# Altium PCB PCB1.PcbDoc (part 1 of 3)
Units mil, origin at the board's own origin, x right, y up, seen from the top; angles counter-clockwise.
Board outline 3200 x 1500 mil, 4 copper layers (L1, L2, L3, L4), stack 61.583 mil thick; 64 components, 73 nets, 299 pads, 164 vias.
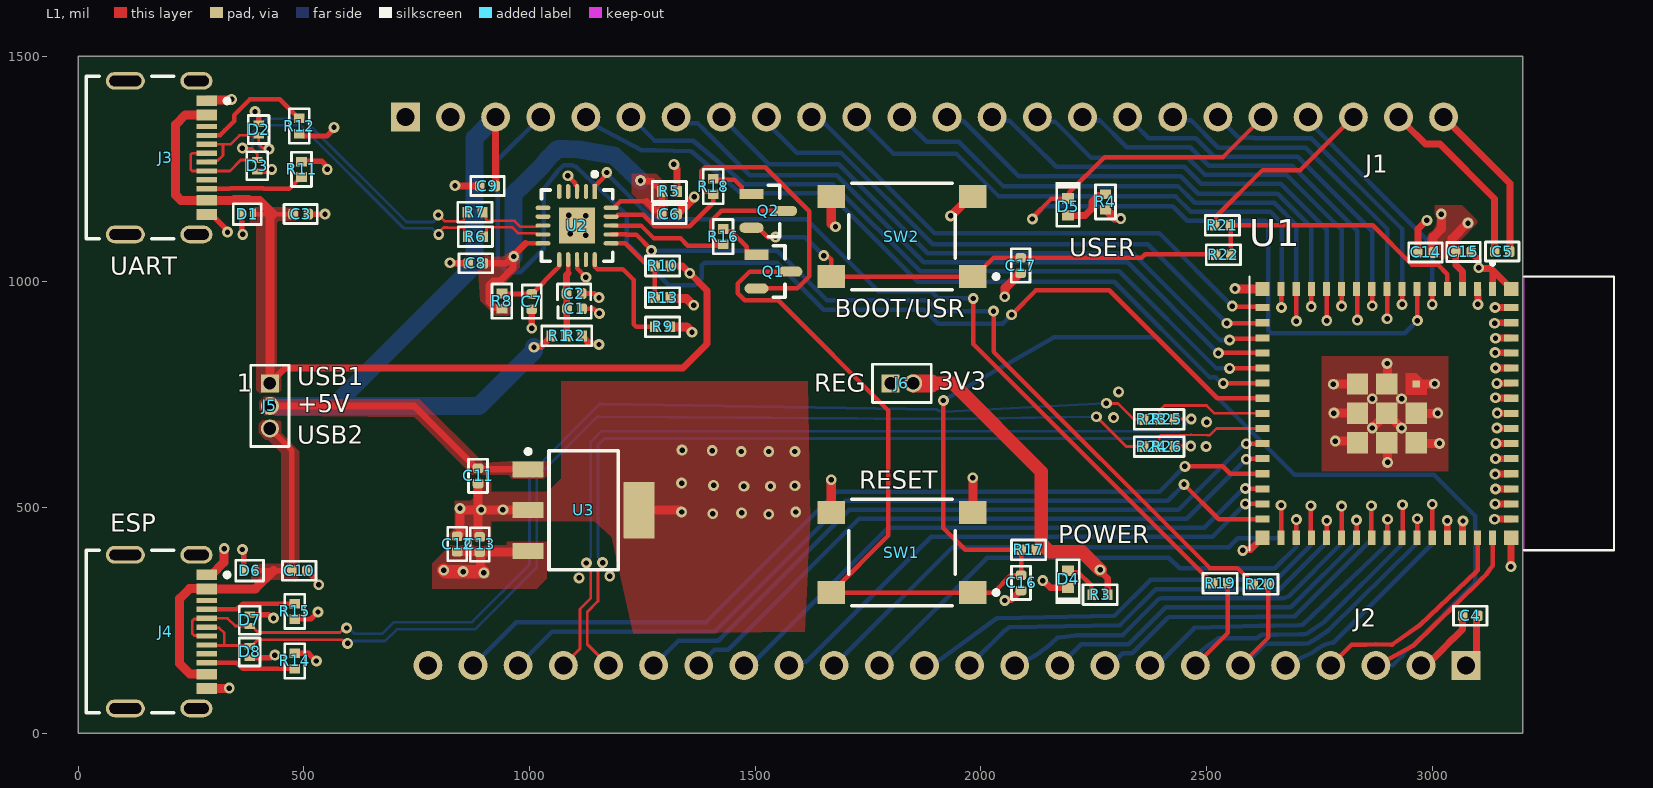
[diagram p0: L1 view]
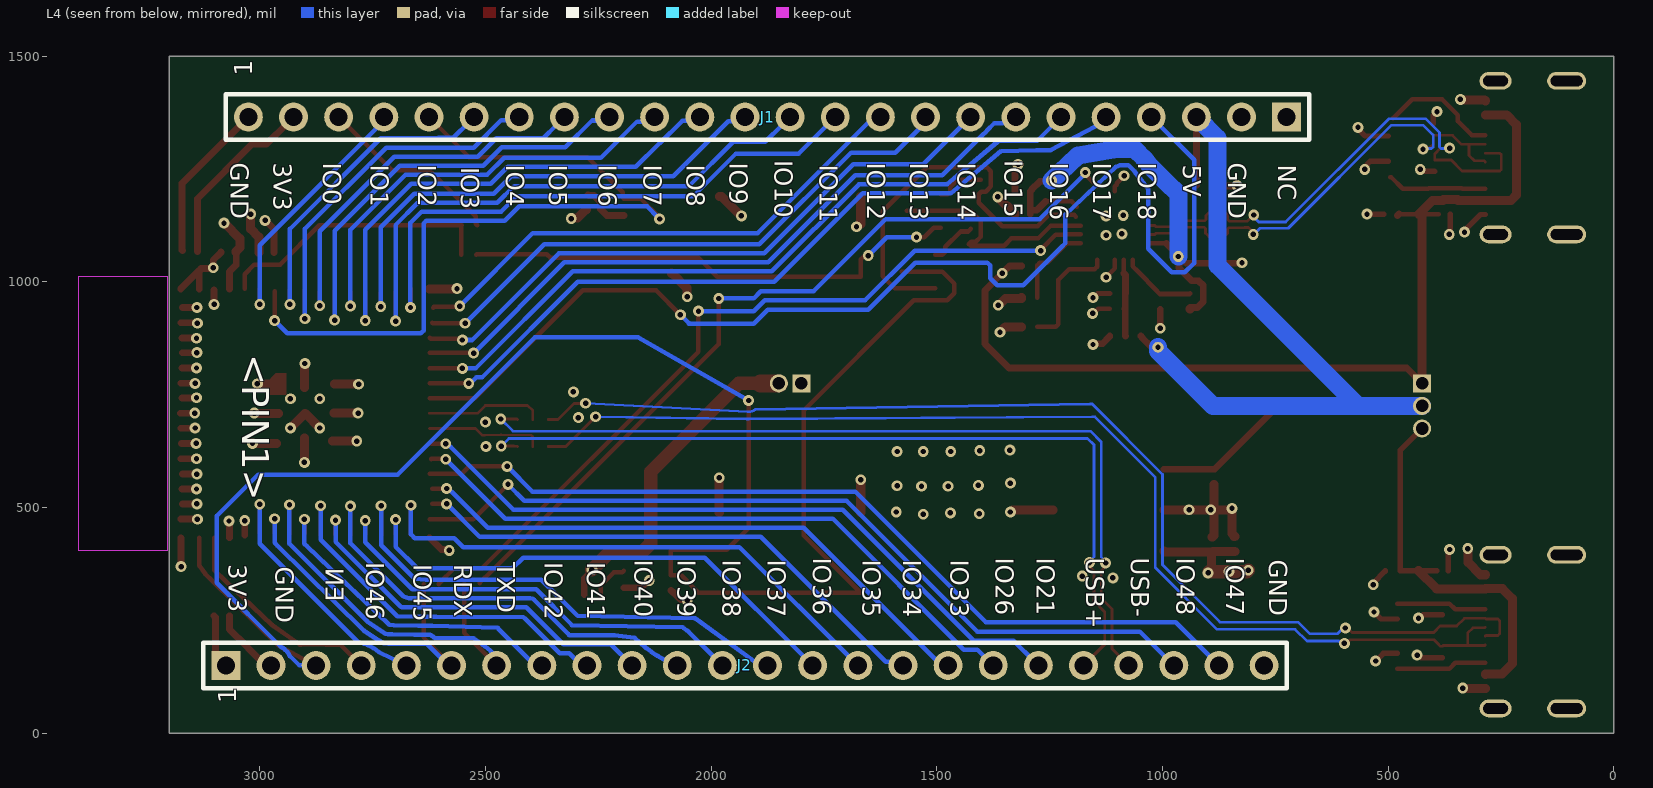
[diagram p1: L4 view, seen from below]
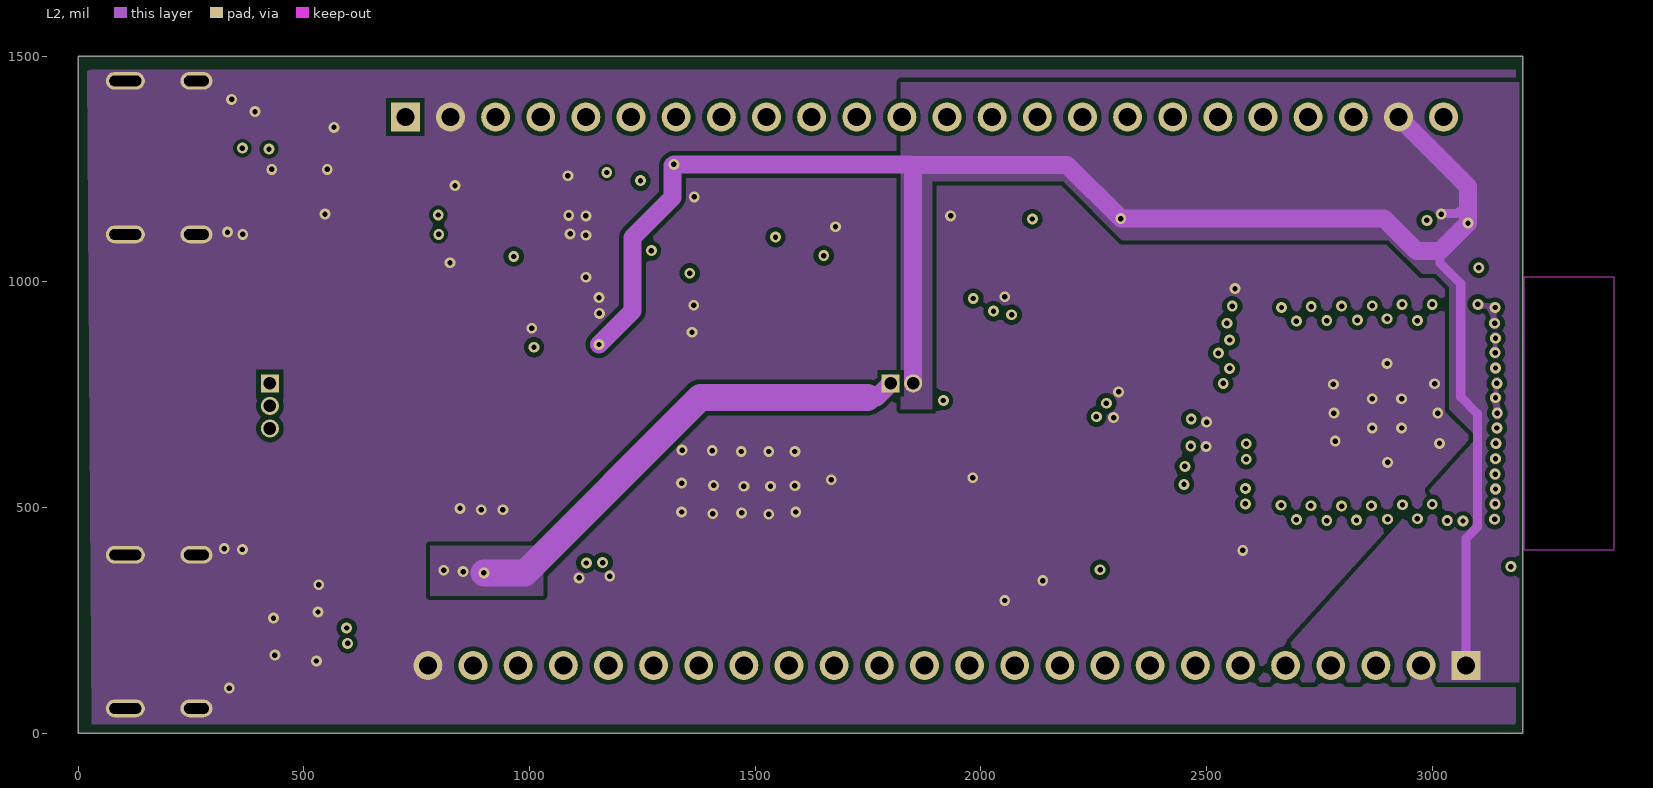
[diagram p2: L2]
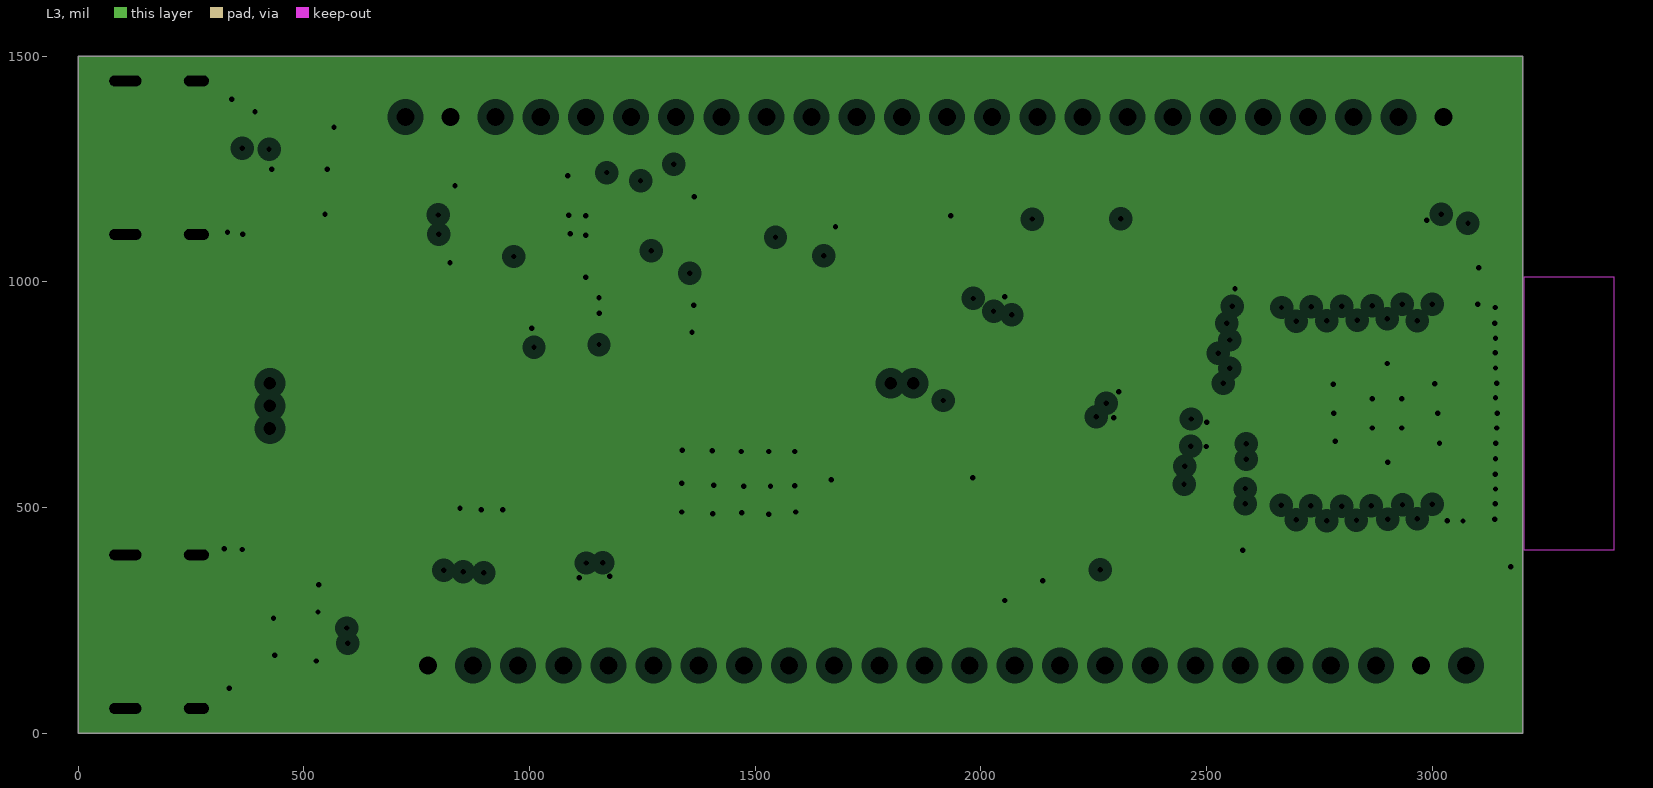
[diagram p3: L3, clearances drawn from the general rule]
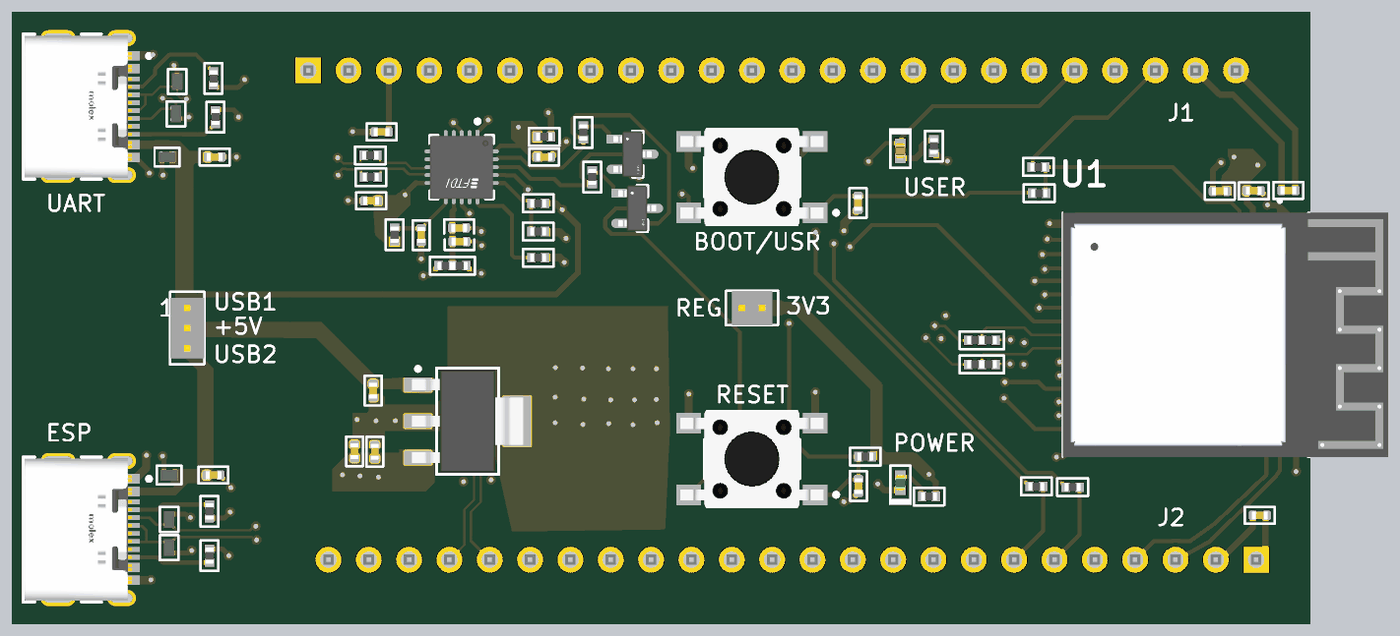
[diagram p5: 3D render of the assembled board from above, using the file's embedded part models]

## Layer stack, top to bottom
Top Solder: solder mask 0.4, Solder Resist, Dk 3.5
L1: signal copper 1.378
Dielectric 2: prepreg 3.9134, PP-006, Dk 4.1
L2: signal copper 0.5984
Dielectric 1: dielectric 49.8031, FR-4, Dk 4.8
L3: plane copper 0.5984, net GND
Dielectric 3: prepreg 3.9134, PP-006, Dk 4.1
L4: signal copper 1.378
Bottom Solder: solder mask 0.4, Solder Resist, Dk 3.5

## Board outline
0,0 3200,0 3200,1500 0,1500

## Design rules (kind name [scope] priority, off if disabled: settings)
Clearance SMALLER [WithinRoom('FTDI') or WithinRoom('USBC2') or WithinRoom('USBC1')] p1: gap=6 ignorepadtopadclearanceinfootprint=FALSE
Clearance "DIFFPAIR Clearance" [InDifferentialPairClass('DIFF90')] p2: gap=8 ignorepadtopadclearanceinfootprint=FALSE
Clearance [All] p3: gap=10 ignorepadtopadclearanceinfootprint=FALSE except(6: SMDPad-SMDPad)
ComponentClearance R24R26 [InComponent('R24') vs InComponent('R26')] p1: gap=0 collisioncheckmode=3 verticalgap=0 showdistances=FALSE
ComponentClearance R1R2 [InComponent('R1') vs InComponent('R2')] p2: gap=0 collisioncheckmode=3 verticalgap=0 showdistances=FALSE
ComponentClearance R23R25 [InComponent('R23') vs InComponent('R25')] p3: gap=0 collisioncheckmode=3 verticalgap=0 showdistances=FALSE
ComponentClearance [All] p4: gap=10 collisioncheckmode=3 verticalgap=10 showdistances=FALSE
DiffPairsRouting DIFF90 [InDifferentialPairClass('DIFF90')] p1: maxlimit=8.1 minlimit=8 mostfreqgap=8 toplayer_minwidth=6.03 toplayer_maxwidth=6.23 toplayer_prefwidth=6.03 midlayer1_minwidth=5.1 midlayer1_maxwidth=5.2 midlayer1_prefwidth=5.1 bottomlayer_minwidth=6.03 bottomlayer_maxwidth=6.23 bottomlayer_prefwidth=6.03 maxuncoupledlength=500
MinimumSolderMaskSliver [All] p1: minsoldermaskwidth=3.15
PlaneClearance [All] p1: clearance=20
PlaneConnect [All] p1: pad.planeconnectstyle=Relief pad.reliefexpansion=20 pad.reliefentries=4 pad.reliefconductorwidth=20 pad.reliefairgap=10 via.planeconnectstyle=Direct via.reliefexpansion=20 via.reliefentries=4 via.reliefconductorwidth=10 via.reliefairgap=10
PolygonConnect [All] p1: connectstyle=Direct reliefconductorwidth=10 reliefentries=4 polygonreliefangle="90 Angle" airgapwidth=10
RoomDefinition FTDI [False] p1: confinementstyle=ConfineIn formatcopy=TRUE lockcomponents=FALSE outline 992,1258 1224,1258 1224,1023 992,1023
RoomDefinition USBC1 [False] p2: confinementstyle=ConfineIn formatcopy=TRUE lockcomponents=FALSE outline 233,1418 325,1418 325,1131 233,1131
RoomDefinition USBC2 [False] p3: confinementstyle=ConfineIn formatcopy=TRUE lockcomponents=FALSE outline 231,79 334,79 334,375 231,375
RoutingVias [All] p1: holewidth=12 width=24 viastyle="Through Hole" minholewidth=12 minwidth=24 maxholewidth=12 maxwidth=24
SilkToSolderMaskClearance [IsPad] p1: minsilkscreentomaskgap=6 clearancetoexposedcopper=TRUE
SolderMaskExpansion [All] p1: expansion=2 istentingtop=FALSE
SupplyNets "Schematic Supply Nets_5" [InNet('GND')] p1: voltage=0.000
SupplyNets "Schematic Supply Nets_4" [InNet('+3V3_REG')] p2: voltage=0.000
SupplyNets "Schematic Supply Nets_3" [InNet('+5V_VBUS2')] p3: voltage=0.000
SupplyNets "Schematic Supply Nets_2" [InNet('+5V')] p4: voltage=0.000
SupplyNets "Schematic Supply Nets_1" [InNet('+3V3')] p5: voltage=0.000
SupplyNets "Schematic Supply Nets" [InNet('+5V_VBUS1')] p6: voltage=0.000
Width [All] p1: maxlimit=100 minlimit=10 preferedwidth=10 minimp=50.000000 maximp=50.000000 favimp=50.000000
24 further rules are at their usual default settings.

## Classes and differential pairs
differential pair class DIFF90: CON1_USB FTDI_USB
differential pair FTDI_USB: +FTDI_USB_P -FTDI_USB_N
differential pair ESP_USB: +ESP_USB_P -ESP_USB_N
differential pair CON_ESP_USB: +CON_ESP_USB_P -CON_ESP_USB_N
differential pair CON2_USB: +CON2_USB_P -CON2_USB_N
differential pair CON1_USB: +CON1_USB_P -CON1_USB_N

## Components (designator, comment, footprint, x,y, rotation, side; value= is the part's Value field where it differs from the comment)
C1 "4u7, 16V" CAPC1005X55N 1100,940 r180 top value=4.7µF
C2 "100nf,50v" CAPC1005X55N 1099,974 r180 top value=100nF
C3 "100nf,50v" CAPC1005X55N 493.07,1150 r180 top value=100nF
C4 "100nf,50v" CAPC1005X55N 3084.07,260 r0 top value=100nF
C5 "100nf,50v" CAPC1005X55N 3155,1067 r180 top value=100nF
C6 "100nf,50v" CAPC1005X55N 1310,1150 r180 top value=100nF
C7 "100nf,50v" CAPC1005X55N 1005,956 r90 top value=100nF
C8 "100nf,50v" CAPC1005X55N 881,1041 r0 top value=100nF
C9 "100nf,50v" CAPC1005X55N 907,1212 r0 top value=100nF
C10 "100nf,50v" CAPC1005X55N 490,360 r180 top value=100nF
C11 "4u7, 16V" CAPC1005X55N 886,570 r90 top value=4.7µF
C12 "10UF ,10V" CAPC1005X55N 840,419 r270 top value=10µF
C13 "10UF ,10V" CAPC1005X55N 890,418 r270 top value=10µF
C14 "10UF ,10V" CAPC1005X55N 2985,1065 r0 top value=10µF
C15 "10UF ,10V" CAPC1005X55N 3069,1066 r180 top value=10µF
C16 "1uf 35V" CAPC1005X55N 2089,333 r90 top value=1µF
C17 "100nf,50v" CAPC1005X55N 2088,1036 r90 top value=100nF
D1 "AQ3045-01ETG" SOD882 375,1150 r0 top
D2 "AQ3045-01ETG" SOD882 400,1337.2 r270 top
D3 "AQ3045-01ETG" SOD882 397,1257 r90 top
D4 "GREEN" LED0402G 2193,341 r90 top
D5 "RED" LED0402R 2193,1165.7 r270 top
D6 "AQ3045-01ETG" SOD882 380,360 r0 top
D7 "AQ3045-01ETG" SOD882 380,250 r270 top
D8 "AQ3045-01ETG" SOD882 380,180 r90 top
J1 "0022284245" HDR_1X24_2.54MM 725,1365 r270 bottom
J2 "0022284245" HDR_1X24_2.54MM 3075,150 r90 bottom locked
J3 "217179-0001" FP-2171790001-MFG 150,1275 r270 top locked
J4 "217179-0001" FP-2171790001-MFG 150,225 r270 top locked
J5 "FTS-103-01-F-S" HDR_1X3_1.27MM 425,775 r0 top locked
J6 "FTS-102-01-F-S" HDR_1X2_1.27MM 1800,775 r90 top locked
Q1 "SS8050-G" FP-SS8050-G-IPC_B 1540.42,1022.6 r0 top
Q2 "SS8050-G" FP-SS8050-G-IPC_B 1529,1157 r0 top
R1 "0R" RESC1005X37N 1065,880 r0 top value=0Ω
R2 "0R" RESC1005X37N 1100,880 r180 top value=0Ω
R3 "1K NEW" RESC1005X37N 2264,307 r0 top value=1kΩ
R4 "1K NEW" RESC1005X37N 2276,1177 r270 top value=1kΩ
R5 "0R" RESC1005X37N 1310,1200 r180 top value=0Ω
R6 "27R" RESC1005X37N 880,1100 r0 top value=27Ω
R7 "27R" RESC1005X37N 879,1154 r0 top value=27Ω
R8 "27R" RESC1005X37N 939,957 r90 top value=27Ω
R9 "10K" RESC1005X37N 1295,900 r0 top value=10kΩ
R10 "4K7" RESC1005X37N 1295,1035 r0 top value=4.7kΩ
R11 "5K1" RESC1005X37N 495,1249 r270 top value=5.1kΩ
R12 "5K1" RESC1005X37N 490,1345 r90 top value=5.1kΩ
R13 "10K" RESC1005X37N 1295,965 r0 top value=10kΩ
R14 "5K1" RESC1005X37N 480,160 r270 top value=5.1kΩ
R15 "5K1" RESC1005X37N 480,270 r90 top value=5.1kΩ
R16 "10K" RESC1005X37N 1429,1100 r90 top value=10kΩ
R17 "10K" RESC1005X37N 2106,406 r0 top value=10kΩ
R18 "10K" RESC1005X37N 1407,1211 r90 top value=10kΩ
R19 "0R" RESC1005X37N 2529.99,332 r180 top value=0Ω
R20 "0R" RESC1005X37N 2619.99,330 r180 top value=0Ω
R21 "27R" RESC1005X37N 2535,1125 r0 top value=27Ω
R22 "27R" RESC1005X37N 2537.01,1060 r0 top value=27Ω
R23 "0R" RESC1005X37N 2378.01,695 r0 top value=0Ω
R24 "0R" RESC1005X37N 2378.01,635 r0 top value=0Ω
R25 "0R" RESC1005X37N 2411.99,695 r180 top value=0Ω
R26 "0R" RESC1005X37N 2411.99,635 r180 top value=0Ω
SW1 "PTS645SH50SMTR92LFS" FP-PTS645SH50SMTR92LFS-MFG 1825,400 r180 top locked
SW2 "PTS645SH50SMTR92LFS" FP-PTS645SH50SMTR92LFS-MFG 1825,1100 r180 top locked
U1 "ESP32-S3-MINI-1-N8" XCVR_ESP32-S3-MINI-1-N8 2899.41,708.46 r270 top locked
U2 "FT231XQ-R" FP-QFN-20-IPC_B 1105.32,1124.59 r270 top locked
U3 "TL1963A-33DCYR" DCY0004A_N 1120,494 r0 top locked

## Footprints (in the part's own frame and the unit in brackets; to place one, negate y for a bottom-side part, rotate by r counter-clockwise, add the part's x,y. Pads: shape width x height; smd on the part's side, far side on the other; paste and mask are expansions set on the pad)
CAPC1005X55N [mm]
  rrect53% 0.54x0.6 smd: 1(-0.43,0) 2(0.43,0)
  silkscreen extent -0.94,-0.13 0.94,0.53, body extent -0.5,-0.25 0.5,0.25, height 0.55
DCY0004A_N [mm] "SOT223, 4-Leads, Body 6.7x3.7mm, Pitch 2.3mm, IPC Medium Density"
  rrect11% 1.75x0.9 smd: 1(-3.125,2.3) 2(-3.125,0) 3(-3.125,-2.3)
  rrect6% 1.75x3.2 smd: 4(3.125,0)
  silkscreen extent -3.25,-3.35 1.95,3.42, body extent -3.5,-3.25 3.5,3.25, height 1.62
FP-2171790001-MFG [mm]
  rect 0.6x1.15 smd paste+0 mask+0: A1B12(-3.2,3.425) A4B9(-2.4,3.425) B1A12(3.2,3.425) B4A9(2.4,3.425)
  rect 0.3x1.15 smd paste+0 mask+0: A5(-1.25,3.425) A6(-0.25,3.425) A7(0.25,3.425) A8(1.25,3.425) B5(1.75,3.425) B6(0.75,3.425) B7(-0.75,3.425) B8(-1.75,3.425)
  rrect100% 1x1.8 hole 1.4 slot 0.6 at 0 deg paste-2539.97 mask+0: S1(-4.32,2.85) S2(4.32,2.85)
  rrect100% 1x2.2 hole 1.8 slot 0.6 at 0 deg paste-2539.97 mask+0: S3(-4.32,-1.15) S4(4.32,-1.15)
  silkscreen extent -4.57,-3.35 4.57,4.7, body extent -4.92,-3.45 4.92,4.1, height 0.25
FP-PTS645SH50SMTR92LFS-MFG [mm]
  rect 1.55x1.3 smd paste+0 mask+0: 1(-3.975,2.25) 2(3.975,2.25) 3(-3.975,-2.25) 4(3.975,-2.25)
  silkscreen extent -5.43,-3 3,3, body extent -4.5,-3 4.5,3, height 4.3
FP-QFN-20-IPC_B [mm]
  rect 0.84x0.242 smd paste+0 mask+0: 1(-1.916,1)
  rrect100% 0.84x0.242 smd paste+0 mask+0: 2(-1.916,0.5) 3(-1.916,0) 4(-1.916,-0.5) 5(-1.916,-1) 11(1.916,-1) 12(1.916,-0.5) 13(1.916,0) 14(1.916,0.5) 15(1.916,1)
  rrect100% 0.242x0.84 smd paste+0 mask+0: 6(-1,-1.916) 7(-0.5,-1.916) 8(0,-1.916) 9(0.5,-1.916) 10(1,-1.916) 16(1,1.916) 17(0.5,1.916) 18(0,1.916) 19(-0.5,1.916) 20(-1,1.916)
  rect 2.05x2.05 smd paste-1000 mask+0: 21(0,0)
  silkscreen extent -3.01,-2 2,2, body extent -2.59,-2.59 2.59,2.59, height 0.25
FP-SS8050-G-IPC_B [mm]
  rect 1.357x0.572 smd paste+0 mask+0: 1(-0.951,0.95)
  rrect100% 1.357x0.572 smd paste+0 mask+0: 2(-0.951,-0.95) 3(0.951,0)
  silkscreen extent 0,-1.45 0.65,1.45, body extent -1.88,-1.7 1.88,1.7, height 0.25
HDR_1X2_1.27MM [mil]
  rect 40x40 hole 28: 1(0,0)
  round 40 hole 28: 2(0,-50)
  silkscreen extent -42,-90 43,40, body extent -42,-75 43,25, height 154
HDR_1X3_1.27MM [mil]
  rect 40x40 hole 28: 1(0,0)
  round 40 hole 28: 2(0,-50) 3(0,-100)
  silkscreen extent -42,-140 42,40, body extent -42,-125 42,25, height 154
HDR_1X24_2.54MM [mil]
  rect 64x64 hole 40: 1(0,0)
  round 64 hole 40: 2(0,-100) 3(0,-200) 4(0,-300) 5(0,-400) 6(0,-500) 7(0,-600) 8(0,-700) 9(0,-800) 10(0,-900) 11(0,-1000) 12(0,-1100) 13(0,-1200) 14(0,-1300) 15(0,-1400) 16(0,-1500) 17(0,-1600) 18(0,-1700) 19(0,-1800) 20(0,-1900) 21(0,-2000) 22(0,-2100) 23(0,-2200) 24(0,-2300)
  silkscreen extent -50,-2350 50,50, body extent -49,-2350 49,50, height 386
LED0402G [mm]
  rect 0.6x0.7 smd: 1(-0.475,0) 2(0.475,0)
  silkscreen extent -1.4,-0.71 1.09,0.71, body extent -0.5,-0.3 0.5,0.3, height 0.21
LED0402R [mm]
  rect 0.6x0.7 smd: 1(-0.475,0) 2(0.475,0)
  silkscreen extent -1.4,-0.71 1.09,0.71, body extent -0.5,-0.3 0.5,0.3, height 0.21
RESC1005X37N [mm]
  rect 0.54x0.6 smd: 1(-0.432,0) 2(0.432,0)
  silkscreen extent -0.97,-0.56 0.97,0.56, body extent -0.5,-0.25 0.5,0.25, height 0.37
SOD882 [mm]
  rect 0.35x0.6 smd: 1(-0.325,0) 2(0.325,0)
  silkscreen extent -0.79,-0.58 0.79,0.58, body extent -0.54,-0.34 0.54,0.34, height 0.44
XCVR_ESP32-S3-MINI-1-N8 [mm]
  rect 0.8x0.4 smd: 1(-7,5.95) 2(-7,5.1) 3(-7,4.25) 4(-7,3.4) 5(-7,2.55) 6(-7,1.7) 7(-7,0.85) 8(-7,0) 9(-7,-0.85) 10(-7,-1.7) 11(-7,-2.55) 12(-7,-3.4) 13(-7,-4.25) 14(-7,-5.1) 15(-7,-5.95) 31(7,-5.95) 32(7,-5.1) 33(7,-4.25) 34(7,-3.4) 35(7,-2.55) 36(7,-1.7) 37(7,-0.85) 38(7,0) 39(7,0.85) 40(7,1.7) 41(7,2.55) 42(7,3.4) 43(7,4.25) 44(7,5.1) 45(7,5.95)
  rect 0.4x0.8 smd: 16(-5.95,-7) 17(-5.1,-7) 18(-4.25,-7) 19(-3.4,-7) 20(-2.55,-7) 21(-1.7,-7) 22(-0.85,-7) 23(0,-7) 24(0.85,-7) 25(1.7,-7) 26(2.55,-7) 27(3.4,-7) 28(4.25,-7) 29(5.1,-7) 30(5.95,-7) 46(5.95,7) 47(5.1,7) 48(4.25,7) 49(3.4,7) 50(2.55,7) 51(1.7,7) 52(0.85,7) 53(0,7) 54(-0.85,7) 55(-1.7,7) 56(-2.55,7) 57(-3.4,7) 58(-4.25,7) 59(-5.1,7) 60(-5.95,7)
  rect 1.2x1.2 smd: 61(0,0) 67(0,1.65) 68(1.65,1.65) 69(-1.65,0) 70(1.65,0) 71(-1.65,-1.65) 72(0,-1.65) 73(1.65,-1.65)
  rect 0.8x0.8 smd: 62(-7,7) 63(-7,-7) 64(7,-7) 65(7,7)
  rect 0.4x0.4 smd paste-1 mask+0: 66(-1.65,1.65)
  L1 region: -1.05,1.05 -2.25,1.05 -2.25,1.65 -1.65,2.25 -1.05,2.25
  Keep-Out Layer region: 7.7,7.725 -7.7,7.725 -7.7,12.775 7.7,12.775
  Keep-Out Layer region: 7.7,7.725 -7.7,7.725 -7.7,12.775 7.7,12.775
  silkscreen extent -8.55,-7.73 7.7,12.78, body extent -7.7,-7.73 7.7,12.78, height 2.55

## Part data
C1 C11: library part CL05A475MO5NUNC, "16V 4.7uF X5R ±20% 0402 Multilayer Ceramic Capacitors MLCC - SMD/SMT ROHS", Case Code (Imperial)=0402, Case Code (Metric)=1005, Dielectric=X5R, Dielectric Material=Ceramic, Manufacturer="Samsung Electro-Mechanics", Max Operating Temperature=85°C, Min Operating Temperature=-55°C, Supplier Part Number=1276-6836-1-ND, Tolerance=20%, Voltage Rating=16V, Case/Package=0402, Category="Ceramic Capacitors", China RoHS=Compliant, ComponentLink1Description=https://datasheet.octopart.com:443/CL05A475MO5NUNC-Samsung-Electro-Mechanics-datasheet-178175196.pdf?src-supplier=Farnell, ComponentLink1URL=https://datasheet.octopart.com:443/CL05A475MO5NUNC-Samsung-Electro-Mechanics-datasheet-178175196.pdf?src-supplier=Farnell, ComponentLink2Description=https://datasheet.octopart.com:443/CL05A475MO5NUNC-Samsung-Electro-Mechanics-datasheet-123102911.pdf?src-supplier=Future+Electronics, ComponentLink2URL=https://datasheet.octopart.com:443/CL05A475MO5NUNC-Samsung-Electro-Mechanics-datasheet-123102911.pdf?src-supplier=Future+Electronics, ComponentLink3Description=https://datasheet.octopart.com:443/CL05A475MO5NUNC-Samsung-Electro-Mechanics-datasheet-110226225.pdf?src-supplier=Future+Electronics, ComponentLink3URL=https://datasheet.octopart.com:443/CL05A475MO5NUNC-Samsung-Electro-Mechanics-datasheet-110226225.pdf?src-supplier=Future+Electronics, ComponentLink4Description=https://datasheet.octopart.com:443/CL05A475MO5NUNC-Samsung-Electro-Mechanics-datasheet-83567908.pdf?src-supplier=Future+Electronics, ComponentLink4URL=https://datasheet.octopart.com:443/CL05A475MO5NUNC-Samsung-Electro-Mechanics-datasheet-83567908.pdf?src-supplier=Future+Electronics, ComponentLink5Description=https://datasheet.octopart.com:443/CL05A475MO5NUNC-Samsung-Electro-Mechanics-datasheet-68297032.pdf?src-supplier=Future+Electronics, ComponentLink5URL=https://datasheet.octopart.com:443/CL05A475MO5NUNC-Samsung-Electro-Mechanics-datasheet-68297032.pdf?src-supplier=Future+Electronics, ComponentLink6Description=https://datasheet.octopart.com:443/CL05A475MO5NUNC-Samsung-Electro-Mechanics-datasheet-87580057.pdf?src-supplier=Future+Electronics, ComponentLink6URL=https://datasheet.octopart.com:443/CL05A475MO5NUNC-Samsung-Electro-Mechanics-datasheet-87580057.pdf?src-supplier=Future+Electronics, ComponentLink7Description=https://datasheet.octopart.com:443/CL05A475MO5NUNC-Samsung-Electro-Mechanics-datasheet-149136694.pdf?src-supplier=Future+Electronics, ComponentLink7URL=https://datasheet.octopart.com:443/CL05A475MO5NUNC-Samsung-Electro-Mechanics-datasheet-149136694.pdf?src-supplier=Future+Electronics, Height=500µm, Length=1mm, Lifecycle Status=Production, Manufacturer Part Number=CL05A475MO5NUNC, Material=Ceramic, Mounting Technology="Surface Mount", Number of Terminals=2, Pricing="1=0.1, 10=0.085 (USD)", REACH SVHC=Yes, RoHS=Compliant, Schedule B="8532240020, 8532240020|8532240020, 8532240020|8532240020|8532240020, 8532240020|8532240020|8532240020|8532240020", Stock=108072, Supplier=DigiKey, Thickness=558.8µm, Voltage Rating (DC)=16V, Width=500µm
C2 C3 C4 C5 C6 C7 C8 C9 C10 C17: library part CL05B104KB54PNC, "50V 100nF X7R ±10% 0402 Multilayer Ceramic Capacitors MLCC - SMD/SMT ROHS", Case/Package=0402, Dielectric Material=Ceramic, Manufacturer="Samsung Electro-Mechanics", Max Operating Temperature=125°C, Min Operating Temperature=-55°C, Supplier Part Number=1276-CL05B104KB54PNCCT-ND, Tolerance=10%, Voltage Rating=50V, Category="Ceramic Capacitors", China RoHS=Compliant, ComponentLink1Description=https://datasheet.octopart.com:443/CL05B104KB54PNC-Samsung-Electro-Mechanics-datasheet-182018727.pdf?src-supplier=IHS, ComponentLink1URL=https://datasheet.octopart.com:443/CL05B104KB54PNC-Samsung-Electro-Mechanics-datasheet-182018727.pdf?src-supplier=IHS, ComponentLink2Description=https://datasheet.octopart.com:443/CL05B104KB54PNC-Samsung-Electro-Mechanics-datasheet-138685816.pdf?src-supplier=Samsung+SCT, ComponentLink2URL=https://datasheet.octopart.com:443/CL05B104KB54PNC-Samsung-Electro-Mechanics-datasheet-138685816.pdf?src-supplier=Samsung+SCT, ComponentLink3Description=https://datasheet.octopart.com:443/CL05B104KB54PNC-Samsung-datasheet-8326407.pdf?src-supplier=TME, ComponentLink3URL=https://datasheet.octopart.com:443/CL05B104KB54PNC-Samsung-datasheet-8326407.pdf?src-supplier=TME, Height=500µm, Length=1mm, Lifecycle Status=Production, Manufacturer Part Number=CL05B104KB54PNC, Material=Ceramic, Mounting Technology="Surface Mount", Number of Terminals=2, Pricing="1=0.1, 10=0.036, 50=0.0246, 100=0.021, 500=0.01504, 1000=0.01387, 2500=0.01274, 5000=0.01196, 10000=0.01021, 20000=0.00846, 30000=0.00808, 50000=0.00765, 70000=0.0074, 100000=0.00716, 120000=0.00704, 240000=0.00666, 250000=0.00664 (USD)", REACH SVHC=Yes, RoHS=Compliant, Schedule B="8532240020, 8532240020|8532240020|8532240020|8532240020|8532240020|8532240020|8532240020|8532240020|8532240020|8532240020|8532240020|8532240020|8532240020|8532240020|8532240020|8532240020|8532240020|8532240020|8532240020|8532240020|8532240020|8532240020|8532240020|85", Supplier=DigiKey, Voltage Rating (DC)=50V, Width=500µm
C12 C13 C14 C15: library part CL05A106MP8NUB8, "Ceramic Capacitor, Multilayer, Ceramic, 10V, 20% +Tol, 20% -Tol, X5R, +-15% TC, 10uF, Surface Mount, 0402 inch", Case Code (Imperial)=0402, Case Code (Metric)=1005, Dielectric Material=Ceramic, Manufacturer="Samsung Electro-Mechanics", Max Operating Temperature=85°C, Min Operating Temperature=-55°C, Supplier Part Number=1276-6830-6-ND, Tolerance=20%, Voltage Rating=10V, Case/Package=0402, Category="Ceramic Capacitors", China RoHS=Compliant, ComponentLink1Description=https://datasheet.octopart.com:443/CL05A106MP8NUB8-Samsung-Electro-Mechanics-datasheet-136460857.pdf?src-supplier=IHS, ComponentLink1URL=https://datasheet.octopart.com:443/CL05A106MP8NUB8-Samsung-Electro-Mechanics-datasheet-136460857.pdf?src-supplier=IHS, ComponentLink2Description=https://datasheet.octopart.com:443/CL05A106MP8NUB8-Samsung-Electro-Mechanics-datasheet-181551178.pdf?src-supplier=Newark, ComponentLink2URL=https://datasheet.octopart.com:443/CL05A106MP8NUB8-Samsung-Electro-Mechanics-datasheet-181551178.pdf?src-supplier=Newark, ComponentLink3Description=https://datasheet.octopart.com:443/CL05A106MP8NUB8-Samsung-Electro-Mechanics-datasheet-136031724.pdf?src-supplier=Newark, ComponentLink3URL=https://datasheet.octopart.com:443/CL05A106MP8NUB8-Samsung-Electro-Mechanics-datasheet-136031724.pdf?src-supplier=Newark, ComponentLink4Description=https://datasheet.octopart.com:443/CL05A106MP8NUB8-Samsung-Electro-Mechanics-datasheet-141346815.pdf?src-supplier=Samsung+SCT, ComponentLink4URL=https://datasheet.octopart.com:443/CL05A106MP8NUB8-Samsung-Electro-Mechanics-datasheet-141346815.pdf?src-supplier=Samsung+SCT, ComponentLink5Description=https://datasheet.octopart.com:443/CL05A106MP8NUB8-Samsung-Electro-Mechanics-datasheet-110326781.pdf?src-supplier=Future+Electronics, ComponentLink5URL=https://datasheet.octopart.com:443/CL05A106MP8NUB8-Samsung-Electro-Mechanics-datasheet-110326781.pdf?src-supplier=Future+Electronics, ComponentLink6Description=https://datasheet.octopart.com:443/CL05A106MP8NUB8-Samsung-Electro-Mechanics-datasheet-96443587.pdf?src-supplier=Future+Electronics, ComponentLink6URL=https://datasheet.octopart.com:443/CL05A106MP8NUB8-Samsung-Electro-Mechanics-datasheet-96443587.pdf?src-supplier=Future+Electronics, ComponentLink7Description=https://datasheet.octopart.com:443/CL05A106MP8NUB8-Samsung-Electro-Mechanics-datasheet-68297032.pdf?src-supplier=Future+Electronics, ComponentLink7URL=https://datasheet.octopart.com:443/CL05A106MP8NUB8-Samsung-Electro-Mechanics-datasheet-68297032.pdf?src-supplier=Future+Electronics, ComponentLink8Description=https://datasheet.octopart.com:443/CL05A106MP8NUB8-Samsung-Electro-Mechanics-datasheet-86032222.pdf?src-supplier=Future+Electronics, ComponentLink8URL=https://datasheet.octopart.com:443/CL05A106MP8NUB8-Samsung-Electro-Mechanics-datasheet-86032222.pdf?src-supplier=Future+Electronics, Height=800µm, Length=1mm, Lifecycle Status=Production, Manufacturer Part Number=CL05A106MP8NUB8, Material=Ceramic, Mounting Technology="Surface Mount", Number of Terminals=2, Pricing="1=0.13, 10=0.077, 50=0.0678 (USD)", REACH SVHC=Yes, RoHS=Compliant, Schedule B="8532240020, 8532240020|8532240020, 8532240020|8532240020|8532240020, 8532240020|8532240020|8532240020|8532240020", Supplier=DigiKey, Thickness=889µm, Voltage Rating (DC)=10V, Width=500µm
C16: library part CL05A105KL5NRNC, "35V 1uF X5R ±10% 0402 Multilayer Ceramic Capacitors MLCC - SMD/SMT ROHS", Case Code (Imperial)=0402, Case Code (Metric)=1005, Dielectric Material=Ceramic, Manufacturer="Samsung Electro-Mechanics", Max Operating Temperature=85°C, Min Operating Temperature=-55°C, Supplier Part Number=1276-6796-6-ND, Tolerance=10%, Voltage Rating=35V, Case/Package=0402, Category="Ceramic Capacitors", China RoHS=Compliant, ComponentLink1Description=https://datasheet.octopart.com:443/CL05A105KL5NRNC-Samsung-Electro-Mechanics-datasheet-182018568.pdf?src-supplier=IHS, ComponentLink1URL=https://datasheet.octopart.com:443/CL05A105KL5NRNC-Samsung-Electro-Mechanics-datasheet-182018568.pdf?src-supplier=IHS, ComponentLink2Description=https://datasheet.octopart.com:443/CL05A105KL5NRNC-Samsung-Electro-Mechanics-datasheet-141346806.pdf?src-supplier=Samsung+SCT, ComponentLink2URL=https://datasheet.octopart.com:443/CL05A105KL5NRNC-Samsung-Electro-Mechanics-datasheet-141346806.pdf?src-supplier=Samsung+SCT, ComponentLink3Description=https://datasheet.octopart.com:443/CL05A105KL5NRNC-Samsung-datasheet-8326407.pdf?src-supplier=TME, ComponentLink3URL=https://datasheet.octopart.com:443/CL05A105KL5NRNC-Samsung-datasheet-8326407.pdf?src-supplier=TME, Height=550µm, Length=990.6µm, Lifecycle Status=Production, Manufacturer Part Number=CL05A105KL5NRNC, Material=Ceramic, Mounting Technology="Surface Mount", Number of Terminals=2, Pricing="1=0.27, 10=0.158, 50=0.1146, 100=0.1012, 500=0.08134, 1000=0.07576, 2500=0.07016, 5000=0.06315 (USD)", REACH SVHC=Yes, RoHS=Compliant, Schedule B="8532240020, 8532240020|8532240020|8532240020|8532240020|8532240020", Supplier=DigiKey, Thickness=558.8µm, Voltage Rating (DC)=35V, Width=508µm
D1 D2 D3 D6 D7 D8: "Bi 30Kv 5V 0.35Pf Automotve Tvs Sod882/ Tr Rohs Compliant: Yes", Breakdown Voltage=7.8V, Clamping Voltage=12V, Leakage Current=100nA, Manufacturer=Littelfuse, Max Breakdown Voltage=9V, Max Operating Temperature=150°C, Min Breakdown Voltage=6.8V, Min Operating Temperature=-40°C, Operating Supply Voltage=5.3V, Peak Pulse Power=40W, Supplier Part Number=F9321CT-ND, Category="TVS Diodes", ComponentLink1Description=https://datasheet.octopart.com:443/AQ3045-01ETG-Littelfuse-datasheet-180606588.pdf?src-supplier=IHS, ComponentLink1URL=https://datasheet.octopart.com:443/AQ3045-01ETG-Littelfuse-datasheet-180606588.pdf?src-supplier=IHS, ComponentLink2Description=https://datasheet.octopart.com:443/AQ3045-01ETG-Littelfuse-datasheet-183003566.pdf?src-supplier=JRH+Electronics, ComponentLink2URL=https://datasheet.octopart.com:443/AQ3045-01ETG-Littelfuse-datasheet-183003566.pdf?src-supplier=JRH+Electronics, ComponentLink3Description=https://datasheet.octopart.com:443/AQ3045-01ETG-Littelfuse-datasheet-140480283.pdf?src-supplier=ODG+(Origin+Data+Global), ComponentLink3URL=https://datasheet.octopart.com:443/AQ3045-01ETG-Littelfuse-datasheet-140480283.pdf?src-supplier=ODG+(Origin+Data+Global), ComponentLink4Description=https://datasheet.octopart.com:443/AQ3045-01ETG-Littelfuse-datasheet-101609968.pdf?src-supplier=Farnell, ComponentLink4URL=https://datasheet.octopart.com:443/AQ3045-01ETG-Littelfuse-datasheet-101609968.pdf?src-supplier=Farnell, ComponentLink5Description=https://datasheet.octopart.com:443/AQ3045-01ETG-Littelfuse-datasheet-170904929.pdf?src-supplier=Future+Electronics, ComponentLink5URL=https://datasheet.octopart.com:443/AQ3045-01ETG-Littelfuse-datasheet-170904929.pdf?src-supplier=Future+Electronics, Lifecycle Status=Production, Manufacturer Part Number=AQ3045-01ETG, Mounting Technology="Surface Mount", Number of Channels=1, Number of Elements=1, Number of Terminals=2, Packaging="Cut Tape", Peak Reverse Current=100nA, Polarity=Bidirectional, Pricing="1=0.43, 10=0.271, 100=0.141, 500=0.131 (USD)", REACH SVHC=Yes, Reverse Standoff Voltage=5.3V, RoHS=Compliant, Stock=13161, Supplier=DigiKey
D4: library part VLMG1500-GS08, "LED Uni-Color Green 574nm 2-Pin Chip 0402(1006Metric) T/R", Ambient Temperature Range High=85°C, Case Code (Imperial)=0402, Case Code (Metric)=1005, Color="Green, Yellow", Forward Current=30mA, Forward Voltage=2.4V, Illumination Color=Green, Lens Color=Clear, Manufacturer=Vishay, Min Operating Temperature=-30°C, Power Dissipation=75mW, Reverse Voltage=5V, Supplier Part Number=VLMG1500-GS08CT-ND, Test Current=20mA, Case/Package=0402, Category=LEDs, ComponentLink1Description=https://datasheet.octopart.com:443/VLMG1500-GS08-Vishay-datasheet-181477802.pdf?src-supplier=IHS, ComponentLink1URL=https://datasheet.octopart.com:443/VLMG1500-GS08-Vishay-datasheet-181477802.pdf?src-supplier=IHS, ComponentLink2Description=https://datasheet.octopart.com:443/VLMG1500-GS08-Vishay-datasheet-21227148.pdf?src-supplier=element14+APAC, ComponentLink2URL=https://datasheet.octopart.com:443/VLMG1500-GS08-Vishay-datasheet-21227148.pdf?src-supplier=element14+APAC, ComponentLink3Description=https://datasheet.octopart.com:443/VLMG1500-GS08-Vishay-datasheet-33014519.pdf?src-supplier=element14+APAC, ComponentLink3URL=https://datasheet.octopart.com:443/VLMG1500-GS08-Vishay-datasheet-33014519.pdf?src-supplier=element14+APAC, ComponentLink4Description=https://datasheet.octopart.com:443/VLMG1500-GS08-Vishay-datasheet-62332426.pdf?src-supplier=Newark, ComponentLink4URL=https://datasheet.octopart.com:443/VLMG1500-GS08-Vishay-datasheet-62332426.pdf?src-supplier=Newark, ComponentLink5Description=https://datasheet.octopart.com:443/VLMG1500-GS08-Vishay-datasheet-102762782.pdf?src-supplier=Future+Electronics, ComponentLink5URL=https://datasheet.octopart.com:443/VLMG1500-GS08-Vishay-datasheet-102762782.pdf?src-supplier=Future+Electronics, ComponentLink6Description=https://datasheet.octopart.com:443/VLMG1500-GS08-Vishay-datasheet-68326145.pdf?src-supplier=TME, ComponentLink6URL=https://datasheet.octopart.com:443/VLMG1500-GS08-Vishay-datasheet-68326145.pdf?src-supplier=TME, ComponentLink7Description=http://sigma.octopart.com:80/rohs_statement/Vishay-company-15.pdf?src-supplier=Compliance+Statements, ComponentLink7URL=http://sigma.octopart.com:80/rohs_statement/Vishay-company-15.pdf?src-supplier=Compliance+Statements, Depth=500µm, Dominant Wavelength=571nm, Height=350µm, Lead Free="Lead Free", Length=1mm, Lens Style=Rectangular, Lifecycle Status=Production, Luminous Intensity=18mcd, Manufacturer Part Number=VLMG1500-GS08, Max Operating Temperature=85°C, Mounting Technology="Surface Mount", Number of Circuits=1, Number of Elements=1, Number of LEDs=1, Number of Terminals=2, Packaging="Cut Tape", Peak Wavelength=571nm, Pins=2, Power Rating=75mW, Pricing="1=0.24, 10=0.164, 100=0.1147, 500=0.09218, 1000=0.0847 (USD)", Radiation Hardening=No, REACH SVHC=Yes, RoHS=Compliant, Schedule B="8541402000, 8541402000|8541402000|8541402000|8541402000|8541402000", Shape=Rectangular, Stock=246776, Supplier=DigiKey, Terminal Pitch=675µm, Viewing Angle=130°, Wavelength=571nm, Width=500µm
D5: library part VLMS1500-GS08, "LED Uni-Color Super Red 639nm 2-Pin Chip 0402(1006Metric) T/R", Case Code (Imperial)=0402, Case Code (Metric)=1005, Color=Red, Forward Current=30mA, Forward Voltage=2.4V, Manufacturer=Vishay, Max Operating Temperature=85°C, Min Operating Temperature=-30°C, Power Rating=75mW, Reverse Voltage=5V, Supplier Part Number=VLMS1500-GS08DKR-ND, Test Current=20mA, Case/Package=0402, Category=LEDs, ComponentLink1Description=https://datasheet.octopart.com:443/VLMS1500-GS08-Vishay-datasheet-181477802.pdf?src-supplier=IHS, ComponentLink1URL=https://datasheet.octopart.com:443/VLMS1500-GS08-Vishay-datasheet-181477802.pdf?src-supplier=IHS, ComponentLink2Description=https://datasheet.octopart.com:443/VLMS1500-GS08-Vishay-datasheet-21227148.pdf?src-supplier=Future+Electronics, ComponentLink2URL=https://datasheet.octopart.com:443/VLMS1500-GS08-Vishay-datasheet-21227148.pdf?src-supplier=Future+Electronics, ComponentLink3Description=https://datasheet.octopart.com:443/VLMS1500-GS08-Vishay-datasheet-102762782.pdf?src-supplier=Future+Electronics, ComponentLink3URL=https://datasheet.octopart.com:443/VLMS1500-GS08-Vishay-datasheet-102762782.pdf?src-supplier=Future+Electronics, ComponentLink4Description=https://datasheet.octopart.com:443/VLMS1500-GS08-Vishay-datasheet-33014519.pdf?src-supplier=element14+APAC, ComponentLink4URL=https://datasheet.octopart.com:443/VLMS1500-GS08-Vishay-datasheet-33014519.pdf?src-supplier=element14+APAC, ComponentLink5Description=https://datasheet.octopart.com:443/VLMS1500-GS08-Vishay-datasheet-68326145.pdf?src-supplier=TME, ComponentLink5URL=https://datasheet.octopart.com:443/VLMS1500-GS08-Vishay-datasheet-68326145.pdf?src-supplier=TME, ComponentLink6Description=https://datasheet.octopart.com:443/VLMS1500-GS08-Vishay-Siliconix-datasheet-62309867.pdf?src-supplier=RS+(Formerly+Allied+Electronics), ComponentLink6URL=https://datasheet.octopart.com:443/VLMS1500-GS08-Vishay-Siliconix-datasheet-62309867.pdf?src-supplier=RS+(Formerly+Allied+Electronics), ComponentLink7Description=https://datasheet.octopart.com:443/VLMS1500-GS08-Vishay-datasheet-62332426.pdf?src-supplier=Newark, ComponentLink7URL=https://datasheet.octopart.com:443/VLMS1500-GS08-Vishay-datasheet-62332426.pdf?src-supplier=Newark, ComponentLink8Description=https://datasheet.octopart.com/VLMS1500-GS08-Vishay-datasheet-16093911.pdf, ComponentLink8URL=https://datasheet.octopart.com/VLMS1500-GS08-Vishay-datasheet-16093911.pdf, ComponentLink9Description=http://sigma.octopart.com:80/rohs_statement/Vishay-company-15.pdf?src-supplier=Compliance+Statements, ComponentLink9URL=http://sigma.octopart.com:80/rohs_statement/Vishay-company-15.pdf?src-supplier=Compliance+Statements, Dominant Wavelength=631nm, Height=350µm, Illumination Color=Red, Lead Free="Lead Free", Length=1mm, Lens Style="Rectangular, Square", Lifecycle Status=Production, Luminous Intensity=18mcd, Manufacturer Part Number=VLMS1500-GS08, Mounting Technology="Surface Mount", Number of Circuits=1, Number of LEDs=1, Number of Terminals=2, Packaging="Cut Tape", Peak Wavelength=631nm, Pins=2, Pricing="1=0.24, 10=0.164, 100=0.1147, 500=0.09218, 1000=0.0847 (USD)", Radiation Hardening=No, REACH SVHC=Yes, RoHS=Compliant, Schedule B="8541402000, 8541402000|8541402000|8541402000|8541402000|8541402000", Shape=Rectangular, Supplier=DigiKey, Terminal Pitch=675µm, Viewing Angle=130°, Wavelength=631nm, Width=500µm
J1 J2: library part 22-28-4245, "Conn Unshrouded Header HDR 24 POS 2.54mm Solder ST Thru-Hole KK® Bag", Contact Resistance=20mΩ, Current Rating=4A, Housing Color=Black, Insulation Resistance=50GΩ, Manufacturer=Molex, Manufacturer Lifecycle Status=ACTIVE, Max Operating Temperature=75°C, Min Operating Temperature=-40°C, Supplier Part Number=900-0022284245-ND, Category="Headers and Wire Housings", China RoHS=Compliant, ComponentLink1Description=https://datasheet.octopart.com:443/22-28-4245-Molex-datasheet-166051265.pdf?src-supplier=IHS, ComponentLink1URL=https://datasheet.octopart.com:443/22-28-4245-Molex-datasheet-166051265.pdf?src-supplier=IHS, ComponentLink2Description=https://datasheet.octopart.com:443/022284245-Molex-datasheet-8337137.pdf?src-supplier=Arrow+Electronics, ComponentLink2URL=https://datasheet.octopart.com:443/022284245-Molex-datasheet-8337137.pdf?src-supplier=Arrow+Electronics, ComponentLink3Description=https://datasheet.octopart.com:443/22-28-4245-Molex-datasheet-16300812.pdf?src-supplier=Molex, ComponentLink3URL=https://datasheet.octopart.com:443/22-28-4245-Molex-datasheet-16300812.pdf?src-supplier=Molex, ComponentLink4Description=https://sigma.octopart.com:443/16300370/technical_drawing/Molex-22-28-4245.pdf?src-supplier=Molex, ComponentLink4URL=https://sigma.octopart.com:443/16300370/technical_drawing/Molex-22-28-4245.pdf?src-supplier=Molex, ComponentLink5Description=https://datasheet.octopart.com:443/22-28-4245-Molex-datasheet-4210.pdf?src-supplier=DigiKey, ComponentLink5URL=https://datasheet.octopart.com:443/22-28-4245-Molex-datasheet-4210.pdf?src-supplier=DigiKey, ComponentLink6Description=http://sigma.octopart.com:80/16300813/rohs_statement/Molex-22-28-4245.pdf?src-supplier=Compliance+Statements, ComponentLink6URL=http://sigma.octopart.com:80/16300813/rohs_statement/Molex-22-28-4245.pdf?src-supplier=Compliance+Statements, ComponentLink7Description=http://sigma.octopart.com:80/conflict_mineral_statement/Molex-company-72.pdf?src-supplier=Compliance+Statements, ComponentLink7URL=http://sigma.octopart.com:80/conflict_mineral_statement/Molex-company-72.pdf?src-supplier=Compliance+Statements, ComponentLink8Description=http://sigma.octopart.com:80/rohs_statement/Molex-company-73.pdf?src-supplier=Compliance+Statements, ComponentLink8URL=http://sigma.octopart.com:80/rohs_statement/Molex-company-73.pdf?src-supplier=Compliance+Statements, ComponentLink9Description=http://sigma.octopart.com:80/reach_statement/Molex-company-74.pdf?src-supplier=Compliance+Statements, ComponentLink9URL=http://sigma.octopart.com:80/reach_statement/Molex-company-74.pdf?src-supplier=Compliance+Statements, Contact Gender=Male, Contact Material=Brass, Contact Plating=Gold, Country of Origin=US, Gender=Male, Lead Free="Lead Free", Lifecycle Status=Production, Manufacturer Part Number=22-28-4245, Mounting Technology="Through Hole", Number of Circuits=24, Number of Contacts=24, Number of Positions=24, Number of Rows=1, Orientation=Vertical, Packaging=Bulk, Pins=24, Pitch=2.54mm, Plating=Tin, Plating Thickness=381nm, Pricing="1=1.21, 10=1.024, 100=0.8699, 500=0.77638, 1000=0.73932, 5000=0.65998, 10000=0.62851 (USD)", REACH SVHC=Yes, RoHS=Compliant, Schedule B="8536694040, 8536694040|8536694040|8536694040|8536694040|8536694040", Stock=1316, Supplier=DigiKey, Terminal Pitch=2.54mm, Termination=Solder
J3 J4: "USB Connector, USB Type C, USB 2.0, Receptacle, 16 Ways, Surface Mount, Through Hole Mount", Contact Resistance=50mΩ, Current Rating=1.25A, Dielectric Material=Polyamide, Insulation Resistance=100MΩ, Manufacturer=Molex, Max Operating Temperature=85°C, Min Operating Temperature=-40°C, Supplier Part Number=900-2171790001CT-ND, Voltage Rating=30V, Category="USB Connectors", ComponentLink1Description=https://datasheet.octopart.com:443/217179-0001-Molex-datasheet-158871109.pdf?src-supplier=ODG+(Origin+Data+Global), ComponentLink1URL=https://datasheet.octopart.com:443/217179-0001-Molex-datasheet-158871109.pdf?src-supplier=ODG+(Origin+Data+Global), ComponentLink2Description=https://sigma.octopart.com:443/158871110/technical_drawing/Molex-217179-0001.pdf?src-supplier=Upverter, ComponentLink2URL=https://sigma.octopart.com:443/158871110/technical_drawing/Molex-217179-0001.pdf?src-supplier=Upverter, ComponentLink3Description=https://datasheet.octopart.com:443/217179-0001-Molex-datasheet-164573281.pdf?src-supplier=RS+(Formerly+Allied+Electronics), ComponentLink3URL=https://datasheet.octopart.com:443/217179-0001-Molex-datasheet-164573281.pdf?src-supplier=RS+(Formerly+Allied+Electronics), ComponentLink4Description=http://sigma.octopart.com:80/conflict_mineral_statement/Molex-company-72.pdf?src-supplier=Compliance+Statements, ComponentLink4URL=http://sigma.octopart.com:80/conflict_mineral_statement/Molex-company-72.pdf?src-supplier=Compliance+Statements, ComponentLink5Description=http://sigma.octopart.com:80/rohs_statement/Molex-company-73.pdf?src-supplier=Compliance+Statements, ComponentLink5URL=http://sigma.octopart.com:80/rohs_statement/Molex-company-73.pdf?src-supplier=Compliance+Statements, ComponentLink6Description=http://sigma.octopart.com:80/reach_statement/Molex-company-74.pdf?src-supplier=Compliance+Statements, ComponentLink6URL=http://sigma.octopart.com:80/reach_statement/Molex-company-74.pdf?src-supplier=Compliance+Statements, Contact Gender=Female, Contact Material="Gold, Nickel", Gender=Receptacle, Height=3.36mm, Lifecycle Status=Production, Manufacturer Part Number=217179-0001, Number of Contacts=16, Number of Ports=1, Number of Rows=1, Pins=16, Pricing="1=0.83, 10=0.704, 25=0.6596, 50=0.628, 100=0.598, 250=0.56052, 500=0.53374 (USD)", REACH SVHC=Yes, RoHS=Compliant, Shell Finish=Nickel, Shell Material="Stainless Steel", Stock=5002, Supplier=DigiKey, Terminal Pitch=500µm, USB Standard="USB 2.0"
J5: "Pin Header, Wire-to-Board, 1.27 mm, 1 Rows, 3 Contacts, Through Hole, FTS", Manufacturer=Samtec, Manufacturer Lifecycle Status=PRODUCTION, Supplier Part Number=612-FTS-103-01-F-S-ND, Category="Headers and Wire Housings", ComponentLink1Description=https://datasheet.octopart.com:443/FTS-103-01-F-S-Samtec-datasheet-97029283.pdf?src-supplier=Newark, ComponentLink1URL=https://datasheet.octopart.com:443/FTS-103-01-F-S-Samtec-datasheet-97029283.pdf?src-supplier=Newark, ComponentLink2Description=https://datasheet.octopart.com:443/FTS-103-01-F-S-Samtec-datasheet-165596534.pdf?src-supplier=Newark, ComponentLink2URL=https://datasheet.octopart.com:443/FTS-103-01-F-S-Samtec-datasheet-165596534.pdf?src-supplier=Newark, ComponentLink3Description=https://sigma.octopart.com:443/97029285/technical_drawing/Samtec-FTS-103-01-F-S.pdf?src-supplier=element14+APAC, ComponentLink3URL=https://sigma.octopart.com:443/97029285/technical_drawing/Samtec-FTS-103-01-F-S.pdf?src-supplier=element14+APAC, ComponentLink4Description=https://datasheet.octopart.com:443/FTS-103-01-F-S-Samtec-datasheet-118493358.pdf?src-supplier=Electro+Sonic, ComponentLink4URL=https://datasheet.octopart.com:443/FTS-103-01-F-S-Samtec-datasheet-118493358.pdf?src-supplier=Electro+Sonic, ComponentLink5Description=https://datasheet.octopart.com:443/FTS-103-01-F-S-Samtec-datasheet-176663378.pdf?src-supplier=Toby+Electronics, ComponentLink5URL=https://datasheet.octopart.com:443/FTS-103-01-F-S-Samtec-datasheet-176663378.pdf?src-supplier=Toby+Electronics, ComponentLink6Description=https://datasheet.octopart.com:443/FTS-103-01-F-S-Samtec-datasheet-116535195.pdf?src-supplier=Toby+Electronics, ComponentLink6URL=https://datasheet.octopart.com:443/FTS-103-01-F-S-Samtec-datasheet-116535195.pdf?src-supplier=Toby+Electronics, ComponentLink7Description=https://datasheet.octopart.com:443/FTS-103-01-F-S-Samtec-datasheet-136395376.pdf?src-supplier=Toby+Electronics, ComponentLink7URL=https://datasheet.octopart.com:443/FTS-103-01-F-S-Samtec-datasheet-136395376.pdf?src-supplier=Toby+Electronics, ComponentLink8Description=https://datasheet.octopart.com:443/FTS-103-01-F-S-Samtec-datasheet-151470456.pdf?src-supplier=Sager+Electronics, ComponentLink8URL=https://datasheet.octopart.com:443/FTS-103-01-F-S-Samtec-datasheet-151470456.pdf?src-supplier=Sager+Electronics, Contact Plating=Gold, Gender=Male, Lifecycle Status=Production, Manufacturer Part Number=FTS-103-01-F-S, Mounting Technology="Through Hole", Number of Contacts=3, Number of Rows=1, Packaging=Bulk, Pitch=1.27mm, Pricing="1=0.73, 50=0.6378, 100=0.5407, 500=0.4491, 1000=0.38362, 2000=0.31431, 5000=0.29982 (USD)", Radiation Hardening=No, RoHS=Compliant, Stock=2657, Supplier=DigiKey, Termination=Solder
J6: "Pin Header, Board-to-Board, 1.27 mm, 1 Rows, 2 Contacts, Through Hole Straight, FTS Series", Manufacturer=Samtec, Manufacturer Lifecycle Status=PRODUCTION, Supplier Part Number=SAM15176-ND, Category="Headers and Wire Housings", ComponentLink1Description=https://datasheet.octopart.com:443/FTS-102-01-F-S-Samtec-datasheet-97029283.pdf?src-supplier=Newark, ComponentLink1URL=https://datasheet.octopart.com:443/FTS-102-01-F-S-Samtec-datasheet-97029283.pdf?src-supplier=Newark, ComponentLink2Description=https://sigma.octopart.com:443/97029285/technical_drawing/Samtec-FTS-102-01-F-S.pdf?src-supplier=Newark, ComponentLink2URL=https://sigma.octopart.com:443/97029285/technical_drawing/Samtec-FTS-102-01-F-S.pdf?src-supplier=Newark, ComponentLink3Description=https://datasheet.octopart.com:443/FTS-102-01-F-S-Samtec-datasheet-118493358.pdf?src-supplier=Electro+Sonic, ComponentLink3URL=https://datasheet.octopart.com:443/FTS-102-01-F-S-Samtec-datasheet-118493358.pdf?src-supplier=Electro+Sonic, ComponentLink4Description=https://datasheet.octopart.com:443/FTS-102-01-F-S-Samtec-datasheet-165596534.pdf?src-supplier=JRH+Electronics, ComponentLink4URL=https://datasheet.octopart.com:443/FTS-102-01-F-S-Samtec-datasheet-165596534.pdf?src-supplier=JRH+Electronics, ComponentLink5Description=https://datasheet.octopart.com:443/FTS-102-01-F-S-Samtec-datasheet-176663378.pdf?src-supplier=Toby+Electronics, ComponentLink5URL=https://datasheet.octopart.com:443/FTS-102-01-F-S-Samtec-datasheet-176663378.pdf?src-supplier=Toby+Electronics, ComponentLink6Description=https://datasheet.octopart.com:443/FTS-102-01-F-S-Samtec-datasheet-116535195.pdf?src-supplier=Toby+Electronics, ComponentLink6URL=https://datasheet.octopart.com:443/FTS-102-01-F-S-Samtec-datasheet-116535195.pdf?src-supplier=Toby+Electronics, ComponentLink7Description=https://datasheet.octopart.com:443/FTS-102-01-F-S-Samtec-datasheet-136395376.pdf?src-supplier=Toby+Electronics, ComponentLink7URL=https://datasheet.octopart.com:443/FTS-102-01-F-S-Samtec-datasheet-136395376.pdf?src-supplier=Toby+Electronics, ComponentLink8Description=https://datasheet.octopart.com:443/FTS-102-01-F-S-Samtec-datasheet-151470456.pdf?src-supplier=Sager+Electronics, ComponentLink8URL=https://datasheet.octopart.com:443/FTS-102-01-F-S-Samtec-datasheet-151470456.pdf?src-supplier=Sager+Electronics, Contact Plating=Gold, Gender=Male, Lifecycle Status=Production, Manufacturer Part Number=FTS-102-01-F-S, Mounting Technology="Through Hole", Number of Contacts=2, Number of Rows=1, Packaging=Bulk, Pitch=1.27mm, Pricing="1=0.49, 50=0.4252, 100=0.3608, 500=0.2994, 1000=0.25609, 2000=0.252 (USD)", Radiation Hardening=No, RoHS=Compliant, Stock=861, Supplier=DigiKey, Termination=Solder
Q1 Q2: "Trans Gp Bjt NPN 25V 1.5A 300MW 3-PIN SOT-23 T/r", Case/Package=TO-236-3, Collector Base Voltage (VCBO)=40V, Collector Emitter Breakdown Voltage=25V, Collector Emitter Saturation Voltage=500mV, Emitter Base Voltage (VEBO)=5V, Manufacturer=Comchip, Max Collector Current=1.5A, Max Junction Temperature (Tj)=150°C, Max Power Dissipation=300mW, Supplier Part Number=641-1790-1-ND, Transition Frequency=100MHz, Category=BJTs, Collector Emitter Voltage (VCEO)=25V, ComponentLink1Description=https://datasheet.octopart.com:443/SS8050-G-Comchip-datasheet-180131983.pdf?src-supplier=IHS, ComponentLink1URL=https://datasheet.octopart.com:443/SS8050-G-Comchip-datasheet-180131983.pdf?src-supplier=IHS, ComponentLink2Description=https://datasheet.octopart.com:443/SS8050-G-Comchip-datasheet-155422643.pdf?src-supplier=Upverter, ComponentLink2URL=https://datasheet.octopart.com:443/SS8050-G-Comchip-datasheet-155422643.pdf?src-supplier=Upverter, ComponentLink3Description=https://datasheet.octopart.com:443/SS8050-G-Comchip-datasheet-189767092.pdf?src-supplier=ODG+(Origin+Data+Global), ComponentLink3URL=https://datasheet.octopart.com:443/SS8050-G-Comchip-datasheet-189767092.pdf?src-supplier=ODG+(Origin+Data+Global), Height=1.15mm, hFE Min=40, Lifecycle Status=Production, Manufacturer Part Number=SS8050-G, Max Breakdown Voltage=25V, Max Operating Temperature=150°C, Mounting Technology="Surface Mount", Number of Elements=1, Number of Terminals=3, Power Dissipation=300mW, Pricing="1=0.24, 10=0.148, 100=0.0921, 500=0.06754, 1000=0.05958 (USD)", REACH SVHC=Yes, RoHS=Compliant, Schedule B=8541100070|8541100070|8541100070|8541100070|8541100070, Stock=58952, Supplier=DigiKey
R1 R2 R5 R19 R20 R23 R24 R25 R26: library part RC0402JR-070RL, "GENERAL PURPOSE CHIP RESISTOR Metal Glaze/thick Film, 0.0625W, 0ohm, Surface Mount, 0402", Case Code (Imperial)=0402, Manufacturer="Yageo Group", Max Operating Temperature=155°C, Max Power Dissipation=63mW, Min Operating Temperature=-55°C, Power Dissipation=62.5mW, Supplier Part Number=311-0.0JRTR-ND, Temperature Coefficient=200ppm/°C, Tolerance=5%, Voltage Rating=50V, Case/Package=0402, Category="Chip SMD Resistors", China RoHS=Non-Compliant, ComponentLink1Description=https://datasheet.octopart.com:443/RC0402JR-070RL-Yageo-datasheet-182189538.pdf?src-supplier=IHS, ComponentLink1URL=https://datasheet.octopart.com:443/RC0402JR-070RL-Yageo-datasheet-182189538.pdf?src-supplier=IHS, ComponentLink2Description=https://datasheet.octopart.com:443/RC0402JR-070RL-Yageo-datasheet-10408619.pdf?src-supplier=Newark, ComponentLink2URL=https://datasheet.octopart.com:443/RC0402JR-070RL-Yageo-datasheet-10408619.pdf?src-supplier=Newark, ComponentLink3Description=https://datasheet.octopart.com:443/RC0402JR-070RL-Yageo-datasheet-12531192.pdf?src-supplier=Seeed+Studio, ComponentLink3URL=https://datasheet.octopart.com:443/RC0402JR-070RL-Yageo-datasheet-12531192.pdf?src-supplier=Seeed+Studio, ComponentLink4Description=https://datasheet.octopart.com:443/RC0402JR-070RL-Yageo-datasheet-8324527.pdf?src-supplier=TME, ComponentLink4URL=https://datasheet.octopart.com:443/RC0402JR-070RL-Yageo-datasheet-8324527.pdf?src-supplier=TME, ComponentLink5Description=https://datasheet.octopart.com:443/RC0402JR-070RL-Yageo-datasheet-62067350.pdf?src-supplier=Farnell, ComponentLink5URL=https://datasheet.octopart.com:443/RC0402JR-070RL-Yageo-datasheet-62067350.pdf?src-supplier=Farnell, ComponentLink6Description=https://datasheet.octopart.com:443/RC0402JR-070RL-Yageo-datasheet-8329306.pdf?src-supplier=element14, ComponentLink6URL=https://datasheet.octopart.com:443/RC0402JR-070RL-Yageo-datasheet-8329306.pdf?src-supplier=element14, ComponentLink7Description=https://datasheet.octopart.com:443/RC0402JR-070RL-Yageo-datasheet-505231.pdf?src-supplier=element14, ComponentLink7URL=https://datasheet.octopart.com:443/RC0402JR-070RL-Yageo-datasheet-505231.pdf?src-supplier=element14, ComponentLink8Description=https://datasheet.octopart.com:443/RC0402JR-070RL-Yageo-datasheet-175423674.pdf?src-supplier=SOS+electronic, ComponentLink8URL=https://datasheet.octopart.com:443/RC0402JR-070RL-Yageo-datasheet-175423674.pdf?src-supplier=SOS+electronic, ComponentLink9Description=https://datasheet.octopart.com:443/RC0402JR-070RL-Yageo-datasheet-164759695.pdf?src-supplier=Future+Electronics, ComponentLink9URL=https://datasheet.octopart.com:443/RC0402JR-070RL-Yageo-datasheet-164759695.pdf?src-supplier=Future+Electronics, ComponentLink10Description=https://datasheet.octopart.com:443/RC0402JR-070RL-Yageo-datasheet-137700087.pdf?src-supplier=Future+Electronics, ComponentLink10URL=https://datasheet.octopart.com:443/RC0402JR-070RL-Yageo-datasheet-137700087.pdf?src-supplier=Future+Electronics, ComponentLink11Description=https://datasheet.octopart.com/RC0402JR-070RL-Yageo-datasheet-73766026.pdf, ComponentLink11URL=https://datasheet.octopart.com/RC0402JR-070RL-Yageo-datasheet-73766026.pdf, ComponentLink12Description=http://sigma.octopart.com:80/rohs_statement/Yageo-company-2.pdf?src-supplier=Compliance+Statements, ComponentLink12URL=http://sigma.octopart.com:80/rohs_statement/Yageo-company-2.pdf?src-supplier=Compliance+Statements, ComponentLink13Description=http://sigma.octopart.com:80/conflict_mineral_statement/Yageo-company-3.pdf?src-supplier=Compliance+Statements, ComponentLink13URL=http://sigma.octopart.com:80/conflict_mineral_statement/Yageo-company-3.pdf?src-supplier=Compliance+Statements, Composition="Thick Film", Contact Plating=Tin, Depth=500µm, Features="Moisture Resistant", Height=350µm, Lead Free="Lead Free", Length=1mm, Lifecycle Status=Production, Manufacturer Part Number=RC0402JR-070RL, Military Standard=Not, Mounting Technology="Surface Mount", Number of Terminals=2, Number of Terminations=2, Packaging="Tape & Reel", Pins=2, Power Rating=63mW, Pricing="10000=0.00206, 20000=0.00185, 30000=0.00175, 50000=0.00163, 70000=0.00155, 100000=0.00148, 120000=0.00145, 240000=0.00134, 250000=0.00133 (USD)", Radiation Hardening=No, REACH SVHC=Yes, RoHS=Compliant, Schedule B="8533290000, 8533290000|8533290000, 8533290000|8533290000|8533290000, 8533290000|8533290000|8533290000|8533290000", Stock=23331506, Supplier=DigiKey, Termination=SMD/SMT, Voltage Rating (DC)=50V, Width=500µm